# Altium PCB AOBoard.PcbDoc
Units mil, origin at the board's own origin, x right, y up, seen from the top; angles counter-clockwise.
Board outline 3937.01 x 5905.51 mil, 2 copper layers (Top Layer, Bottom Layer); 14 components, 74 nets, 48 pads, 0 vias.
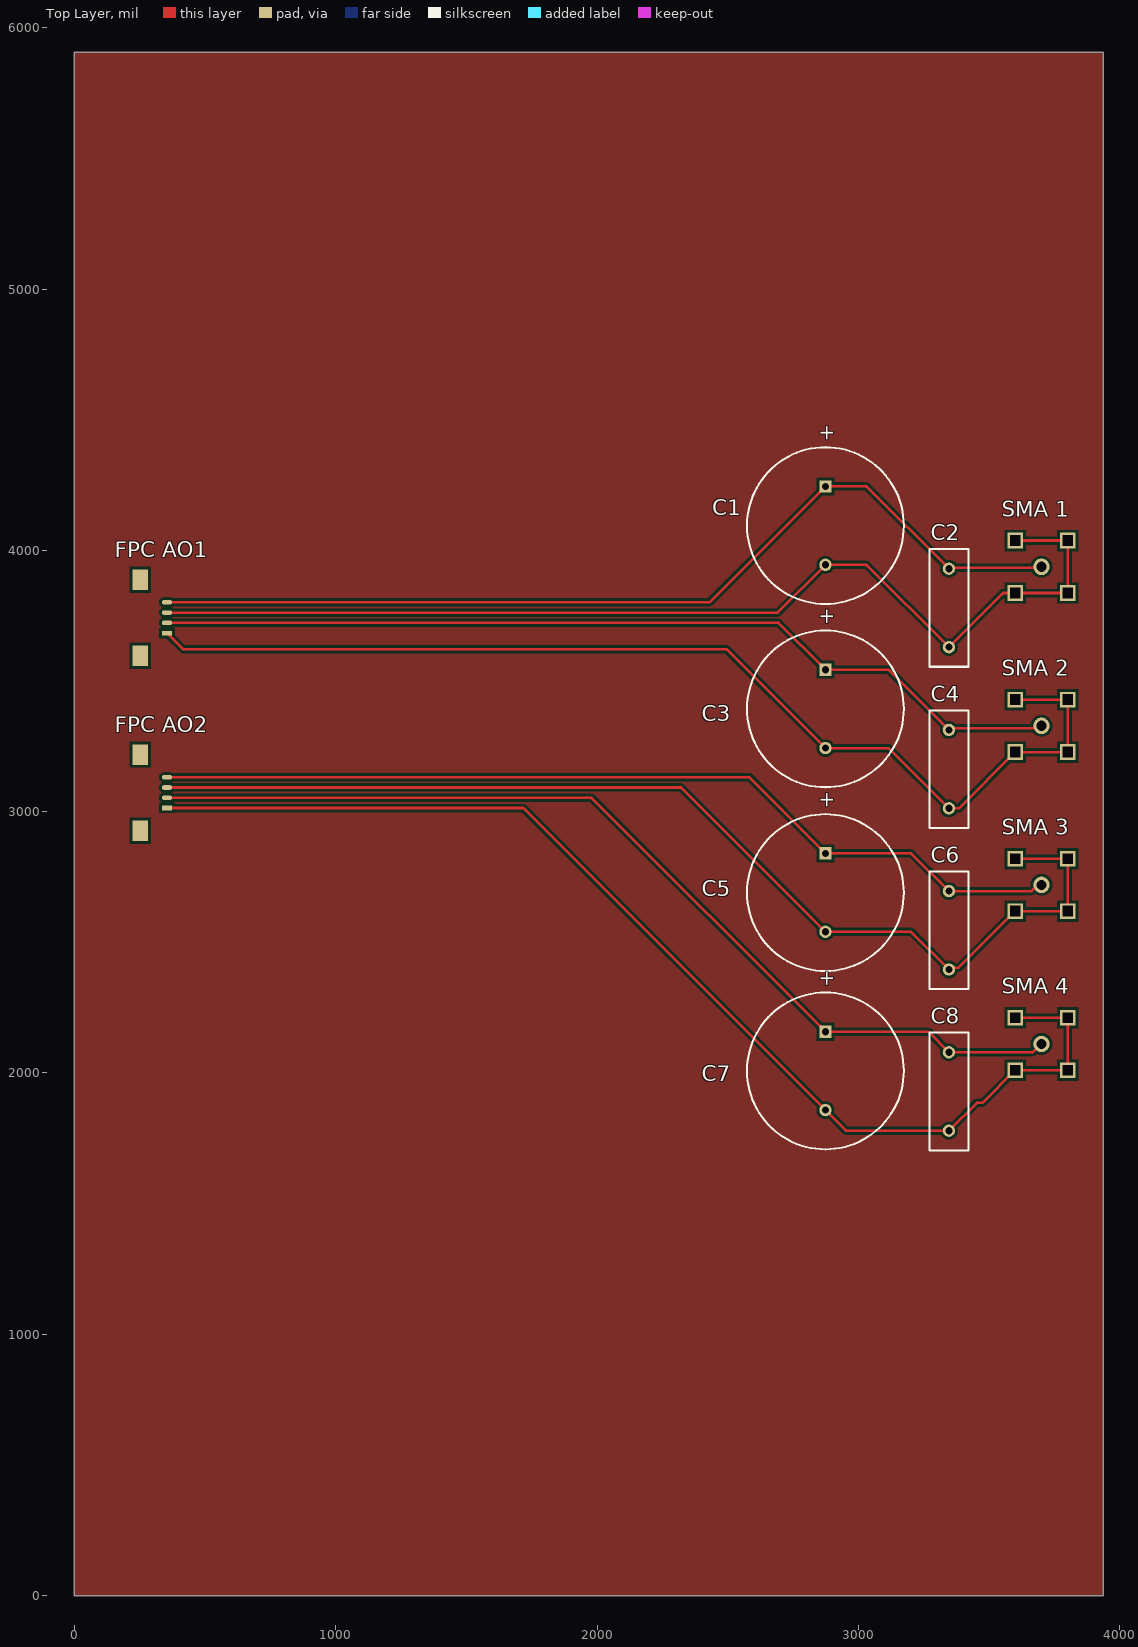
[diagram p0: Top Layer view]
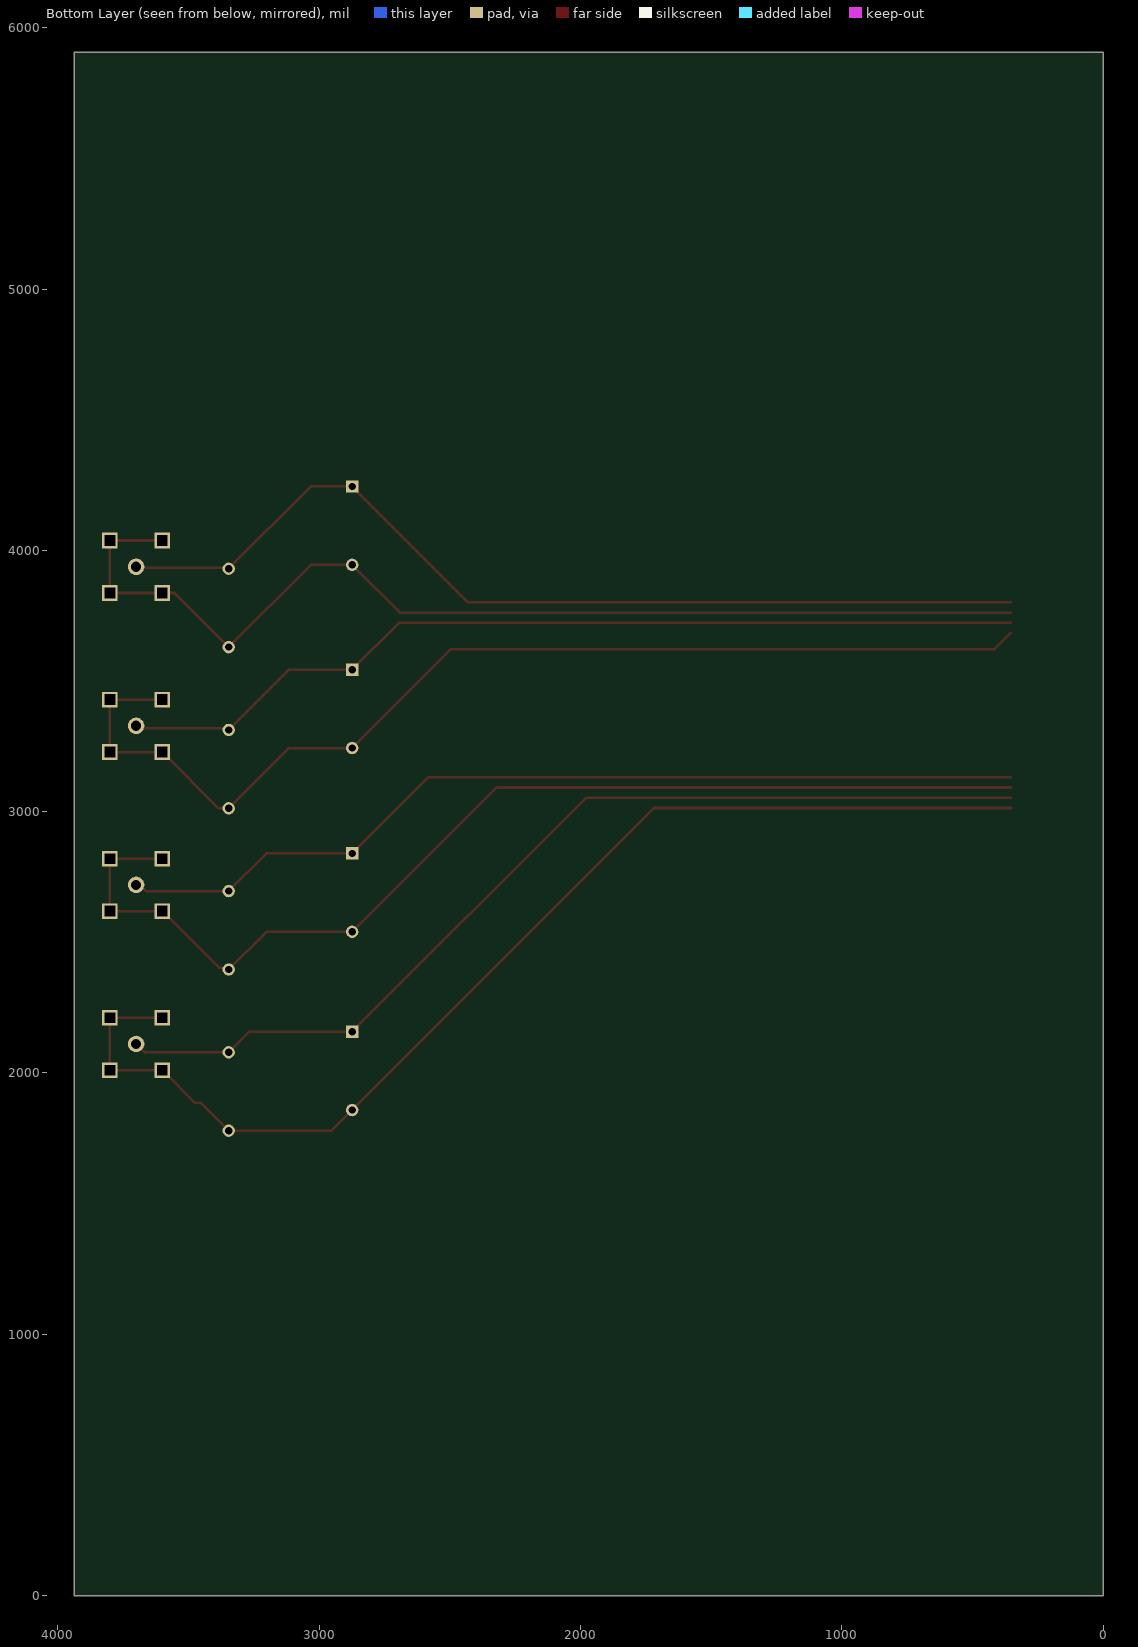
[diagram p1: Bottom Layer view, seen from below]

## Layer stack, top to bottom
Top Solder: solder mask 0.4, Solder Resist, Dk 3.5
Top Layer: signal copper 1.4
Dielectric 1: dielectric 12.6, FR-4, Dk 4.8
Bottom Layer: signal copper 1.4
Bottom Solder: solder mask 0.4, Solder Resist, Dk 3.5

## Board outline
0,0 0,5905.51 3937.01,5905.51 3937.01,0

## Design rules (kind name [scope] priority, off if disabled: settings)
Clearance [All] p1: gap=10 ignorepadtopadclearanceinfootprint=FALSE except(0: Arc-Hole Track-Hole SMDPad-Hole THPad-Hole Via-Hole Fill-Hole Poly-Hole Region-Hole Text-Hole)
PolygonConnect [All] p1: connectstyle=Relief reliefconductorwidth=10 reliefentries=4 polygonreliefangle="90 Angle" airgapwidth=10
RoutingVias [All] p1: holewidth=28 width=50 viastyle="Through Hole" minholewidth=28 minwidth=50 maxholewidth=28 maxwidth=50
SolderMaskExpansion [All] p1: expansion=4
Width [All] p1: maxlimit=10 minlimit=10 preferedwidth=10
30 further rules are at their usual default settings.

## Components (designator, comment, footprint, x,y, rotation, side; value= is the part's Value field where it differs from the comment)
C1 "Cap Pol1" RB7.6-15 2874.02,4094.49 r90 top value=100pF
C2 "Cap" RAD-0.3 3346.46,3779.53 r90 top value=100pF
C3 "Cap Pol1" RB7.6-15 2874.02,3393.31 r90 top value=100pF
C4 "Cap" RAD-0.3 3346.46,3162.73 r90 top value=100pF
C5 "Cap Pol1" RB7.6-15 2874.02,2690.29 r90 top value=100pF
C6 "Cap" RAD-0.3 3346.46,2545.93 r90 top value=100pF
C7 "Cap Pol1" RB7.6-15 2874.02,2007.87 r90 top value=100pF
C8 "Cap" RAD-0.3 3346.46,1929.13 r90 top value=100pF
"FPC AO1" "FPC socket 4 pin" "FPC 4Pin" 354.33,3683.07 r180 top
"FPC AO2" "FPC socket 4 pin" "FPC 4Pin" 354.33,3013.78 r180 top
"SMA 1" "SMA" SMA 3700.79,3937.01 r0 top
"SMA 2" "SMA" SMA 3700.79,3328.35 r0 top
"SMA 3" "SMA" SMA 3700.79,2719.68 r0 top
"SMA 4" "SMA" SMA 3700.79,2111.02 r0 top

## Footprints (in the part's own frame and the unit in brackets; to place one, negate y for a bottom-side part, rotate by r counter-clockwise, add the part's x,y. Pads: shape width x height; smd on the part's side, far side on the other; paste and mask are expansions set on the pad)
"FPC 4Pin" [mm]
  rect 1x0.45 smd: 1(0,0)
  oval 1x0.45 smd: 2(0,-1) 3(0,-2) 4(0,-3)
  rect 1.5x2 smd: 5(2.6,-5.2) 6(2.6,2.2)
RAD-0.3 [mm] "Radial Cap, Thru-Hole; 2 Leads; 0.3 in Pin Spacing"
  round 1.2 hole 0.7: 1(-3.81,0) 2(3.81,0)
  silkscreen extent -5.71,-1.9 5.72,1.91
RB7.6-15 [mm] "Polarized Capacitor (Radial); 2 Leads"
  rect 1.2x1.2 hole 0.7: 1(3.81,0)
  round 1.2 hole 0.7: 2(-3.81,0)
  silkscreen extent -7.62,-7.62 7.62,7.62
SMA [mm]
  round 1.6 hole 1: 1(0,0)
  rect 1.524x1.524 hole 1 square: 2(-2.55,-2.55) 2(-2.55,2.55) 2(2.55,-2.55) 2(2.55,2.55)

## Part data
C1 C3 C5 C7: "Polarized Capacitor (Radial)", LatestRevisionDate=17-Jul-2002, LatestRevisionNote="Re-released for DXP Platform.", PackageDescription="Polarized Capacitor (Radial); 2 Leads", PackageReference=RB7.6-15, Published=8-Jun-2000, Publisher="Altium Limited"
C2 C4 C6 C8: "Capacitor", LatestRevisionDate=17-Jul-2002, LatestRevisionNote="Re-released for DXP Platform.", PackageDescription="Radial Cap, Thru-Hole; 2 Leads; 0.3 in Pin Spacing", PackageReference=RAD-0.3, Published=8-Jun-2000, Publisher="Altium Limited"

## Nets (pads, with @x,y where several pads share a name; then routed paths per layer and width w, separated by ;. In a path a pad name is that pad's centre, name@x,y a point inside that pad or via, vN(x,y) a via of type N, cw(c..) or ccw(c..) an arc to the next point about the centre after c; other vN are vias at no path point)
NetC1_1: "FPC AO1.4" "SMA 1.1" C1.1 C2.2 | length 3663.6
  Top Layer w10: 354.33,3801.18 2430.71,3801.18 C1.1 3031.5,4244.49 C2.2 3350.2,3933.27 3697.05,3933.27 3700.79,3937.01
NetC1_2: "FPC AO1.3" "SMA 1.2" C1.2 C2.1 | length 4140.3
  Top Layer w10: 354.33,3761.81 2691.34,3761.81 C1.2 3031.5,3944.49 C2.1 3553.54,3836.61 3600.39,3836.61 3801.18,3836.61 3801.18,4037.4 3600.39,4037.4
NetC3_1: "FPC AO1.2" "SMA 2.1" C3.1 C4.2 | length 3522.6
  Top Layer w10: 354.33,3722.44 2694.88,3722.44 C3.1 3115.88,3543.31 C4.2 3353.58,3319.86 3692.3,3319.86 3700.79,3328.35
NetC3_2: "FPC AO1.1" "SMA 2.2" C3.2 C4.1 | length 4215.2
  Top Layer w10: 354.33,3683.07 415.35,3622.05 2495.28,3622.05 C3.2 3115.88,3243.31 C4.1 3385.17,3012.73 3600.39,3227.95 3801.18,3227.95 3801.18,3428.74 3600.39,3428.74
NetC5_1: "FPC AO2.4" "SMA 3.1" C5.1 C6.2 | length 3536.9
  Top Layer w10: 354.33,3131.89 2582.41,3131.89 C5.1 3202.1,2840.29 C6.2 3662.69,2695.93 3686.45,2719.69 3700.79,2719.69
NetC5_2: "FPC AO2.3" "SMA 3.2" C5.2 C6.1 | length 4229.5
  Top Layer w10: 354.33,3092.52 2321.78,3092.52 C5.2 3202.1,2540.29 C6.1 3353.58,2403.06 3384.16,2403.06 3600.39,2619.29 3801.18,2619.29 3801.18,2820.08 3600.39,2820.08
NetC7_1: "FPC AO2.2" "SMA 4.1" C7.1 C8.2 | length 3763.1
  Top Layer w10: 354.33,3053.15 1978.74,3053.15 C7.1 3267.72,2157.87 C8.2 3666.92,2079.13 3698.81,2111.02 3700.79,2111.02
NetC7_2: "FPC AO2.1" "SMA 4.2" C7.2 C8.1 | length 4455.7
  Top Layer w10: 354.33,3013.78 1718.11,3013.78 C7.2 2952.76,1779.13 C8.1 3453.27,1885.95 3475.71,1885.95 3600.39,2010.63 3801.18,2010.63 3801.18,2211.42 3600.39,2211.42
"NetFPC AI1_1": 
"NetFPC AI1_2": 
"NetFPC AI1_3": 
"NetFPC AI1_4": 
"NetFPC AI1_5": 
"NetFPC AI1_6": 
"NetFPC AI1_7": 
"NetFPC AI1_8": 
"NetFPC AI1_9": 
"NetFPC AI1_10": 
"NetFPC AI1_11": 
"NetFPC AI1_12": 
"NetFPC AI2_1": 
"NetFPC AI2_2": 
"NetFPC AI2_3": 
"NetFPC AI2_4": 
"NetFPC AI2_5": 
"NetFPC AI2_6": 
"NetFPC AI2_7": 
"NetFPC AI2_8": 
"NetFPC AI2_9": 
"NetFPC AI2_10": 
"NetFPC AI2_11": 
"NetFPC AI2_12": 
"NetFPC AO_1": 
"NetFPC AO_2": 
"NetFPC AO_3": 
"NetFPC AO_4": 
"NetFPC DIO1_1": 
"NetFPC DIO1_2": 
"NetFPC DIO1_3": 
"NetFPC DIO1_4": 
"NetFPC DIO1_5": 
"NetFPC DIO1_6": 
"NetFPC DIO1_7": 
"NetFPC DIO1_8": 
"NetFPC DIO1_9": 
"NetFPC DIO1_10": 
"NetFPC DIO1_11": 
"NetFPC DIO1_12": 
"NetFPC DIO2_1": 
"NetFPC DIO2_2": 
"NetFPC DIO2_3": 
"NetFPC DIO2_4": 
"NetFPC DIO2_5": 
"NetFPC DIO2_6": 
"NetFPC DIO2_7": 
"NetFPC DIO2_8": 
"NetFPC DIO2_9": 
"NetFPC DIO2_10": 
"NetFPC DIO2_11": 
"NetFPC DIO2_12": 
"NetFPC DIO3_1": 
"NetFPC DIO3_2": 
"NetFPC DIO3_3": 
"NetFPC DIO3_4": 
"NetFPC DIO3_5": 
"NetFPC DIO3_6": 
"NetFPC DIO3_7": 
"NetFPC DIO3_8": 
"NetFPC DIO3_9": 
"NetFPC DIO3_10": 
"NetFPC DIO3_11": 
"NetFPC DIO3_12": 
"NetFPC Other_1": 
"NetFPC Other_2": 
pads on no net: "FPC AO1.5" "FPC AO1.6" "FPC AO2.5" "FPC AO2.6"

## Polygon pours and split planes (outlines as drawn)
no net on Drill Drawing (solid): 2047.24,4685.04
no net on Drill Drawing (solid): 2480.32,4921.26
no net on Drill Drawing (solid): 944.88,4566.93
no net on Drill Drawing (solid): 78.74,4330.71
no net on Drill Drawing (solid): 1417.32,4212.6
no net on Drill Drawing (solid): 1102.36,3582.68
no net on Drill Drawing (solid): 354.33,3818.9 2204.72,3818.9 3307.09,2716.54 3267.72,2677.17 314.96,2677.17
no net on Top Layer (solid, pour order 8): 0,5905.51 3937.01,5905.51 3937.01,0 0,0

## Silkscreen, mask and mechanical layers (free items; w line width, h text height)
Drill Drawing:
  lines w10: 0,5905.51 0,1968.5 0,0 1968.5,0 3937.01,0 3937.01,3937.01 3937.01,5905.51
  text "AO Board V1.0 Ying" at 2795.28,39.37 h60
  text "FirstBoard V1.0 Ying" at 7539.37,-3631.89 h60

## Text inside footprints (layer, text, board x,y; h text height)
C1: Top Overlay "+" at 2903.02,4414.64 h59.06 r90
C3: Top Overlay "+" at 2903.02,3713.46 h59.06 r90
C5: Top Overlay "+" at 2903.02,3010.44 h59.06 r90
C7: Top Overlay "+" at 2903.02,2328.03 h59.06 r90